# Altium PCB IR_remote.PcbDoc
Units mil, origin at the board's own origin, x right, y up, seen from the top; angles counter-clockwise.
Board outline 4465 x 2820 mil, 2 copper layers (Top Layer, Bottom Layer); 30 components, 34 nets, 121 pads, 26 vias.
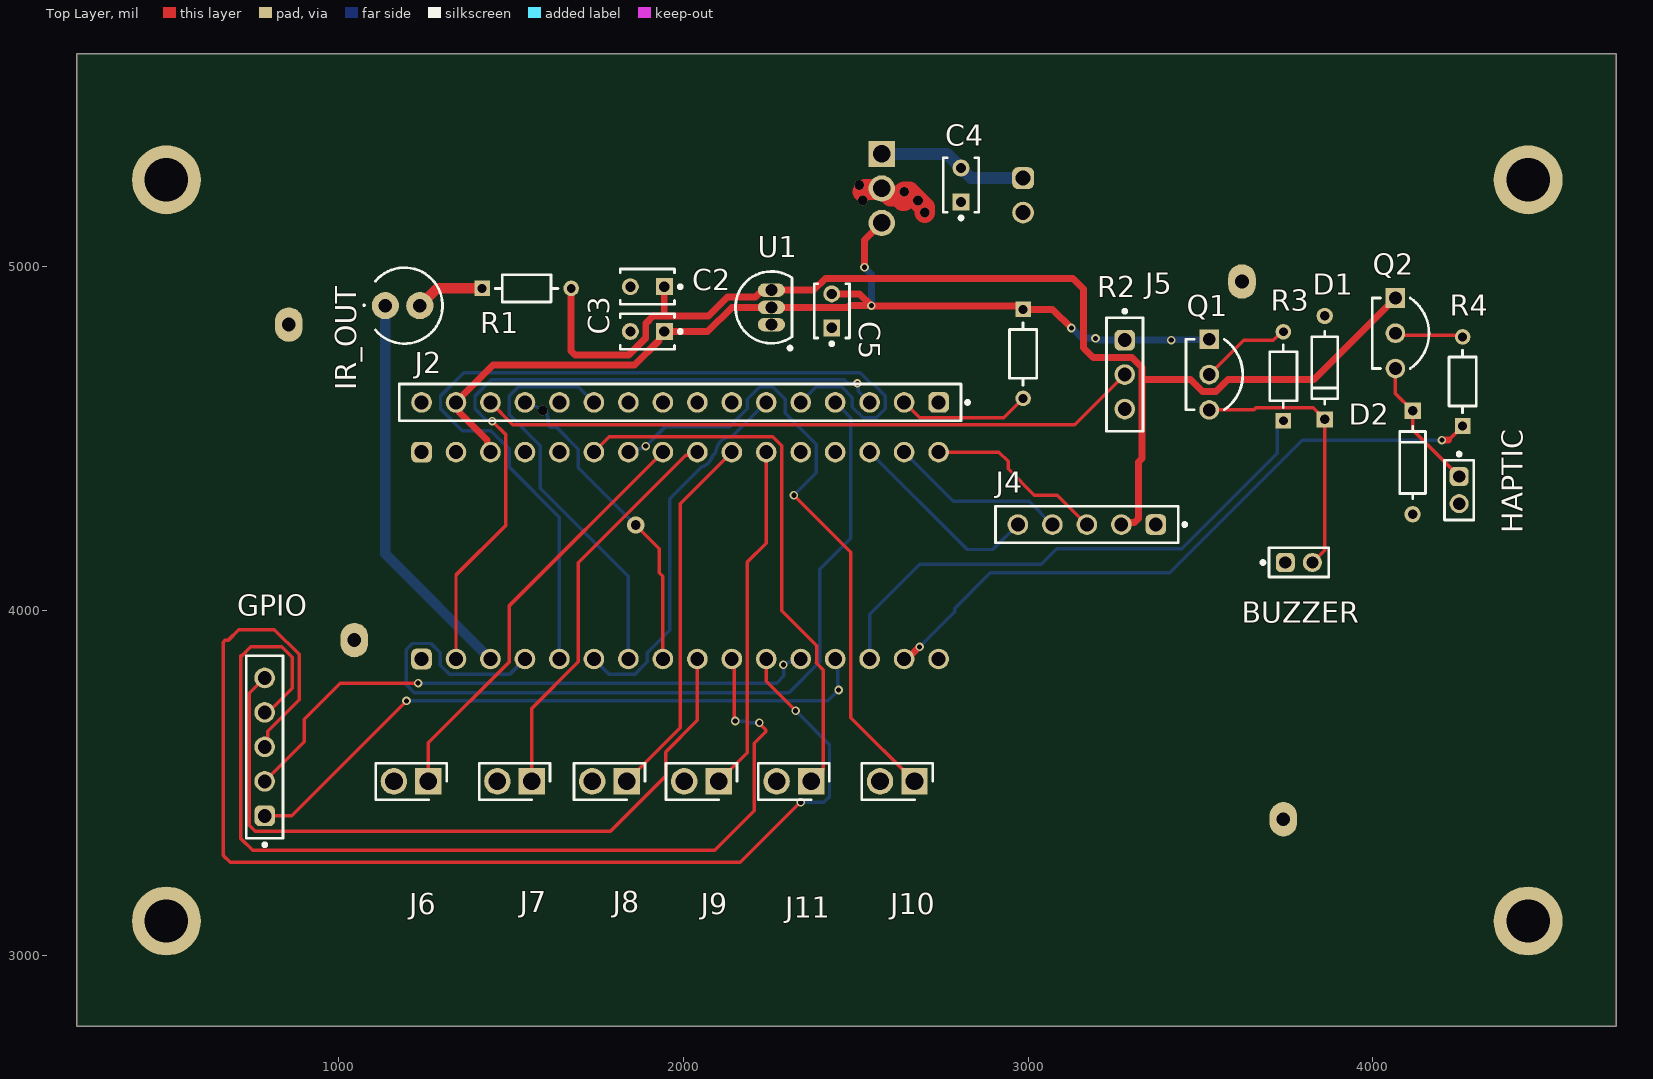
[diagram p0: Top Layer view]
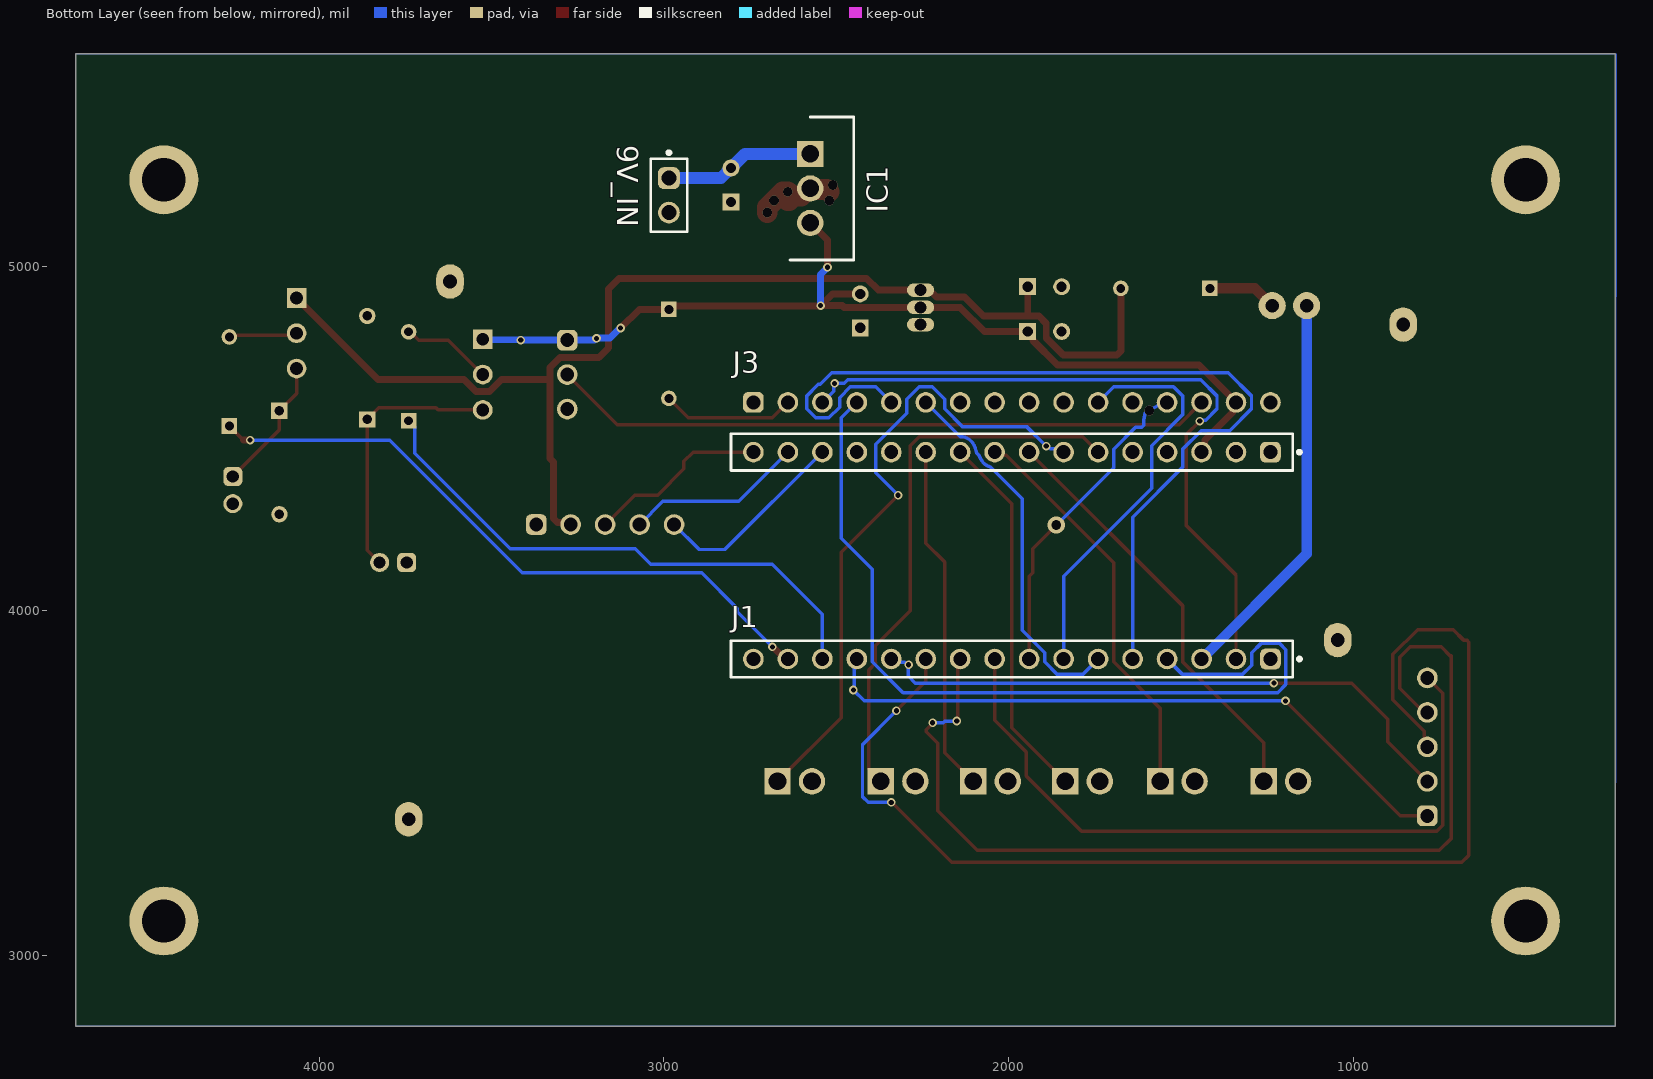
[diagram p1: Bottom Layer view, seen from below]
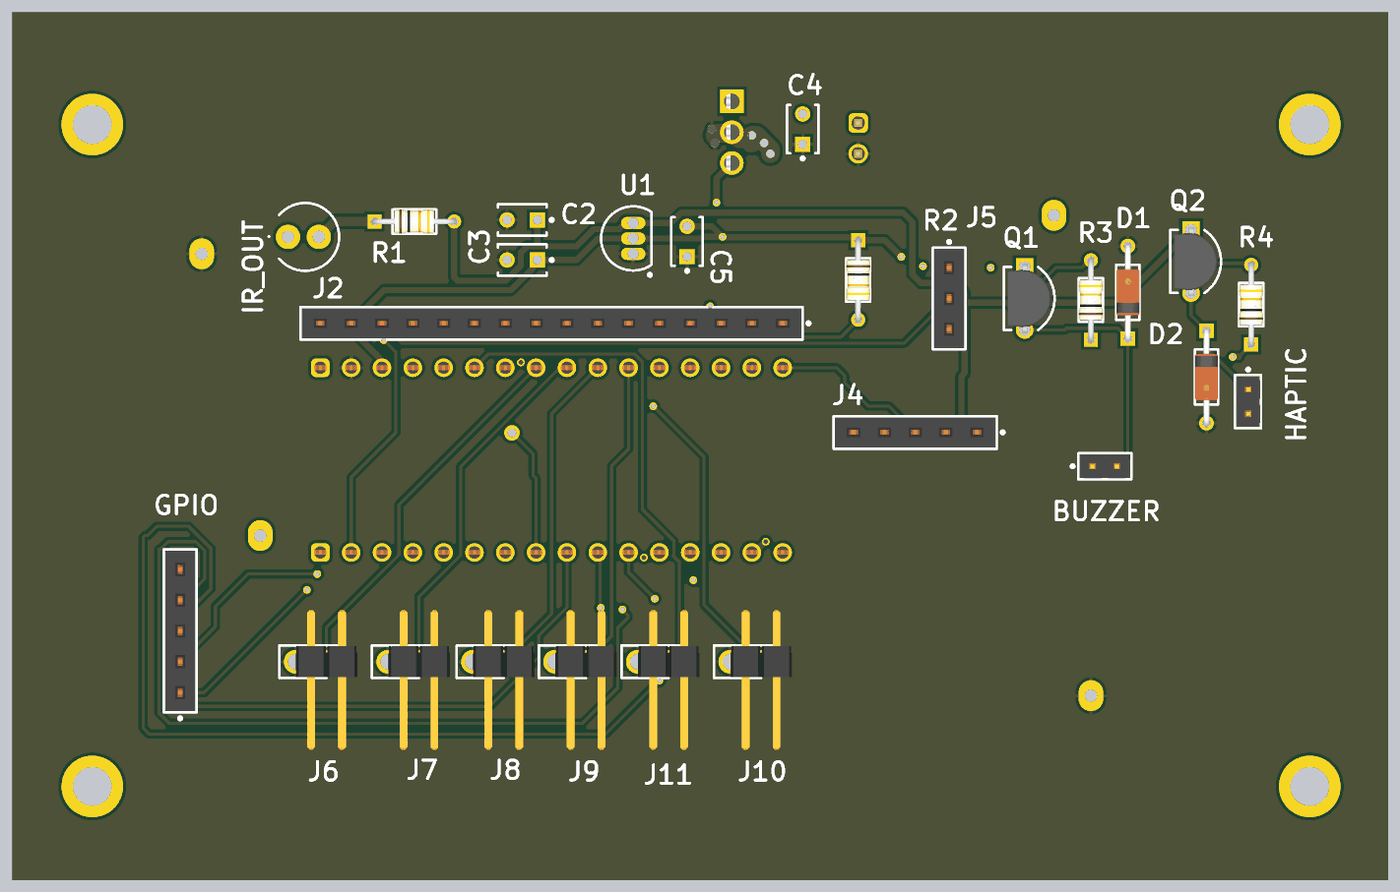
[diagram p2: 3D render of the assembled board from above, using the file's embedded part models]
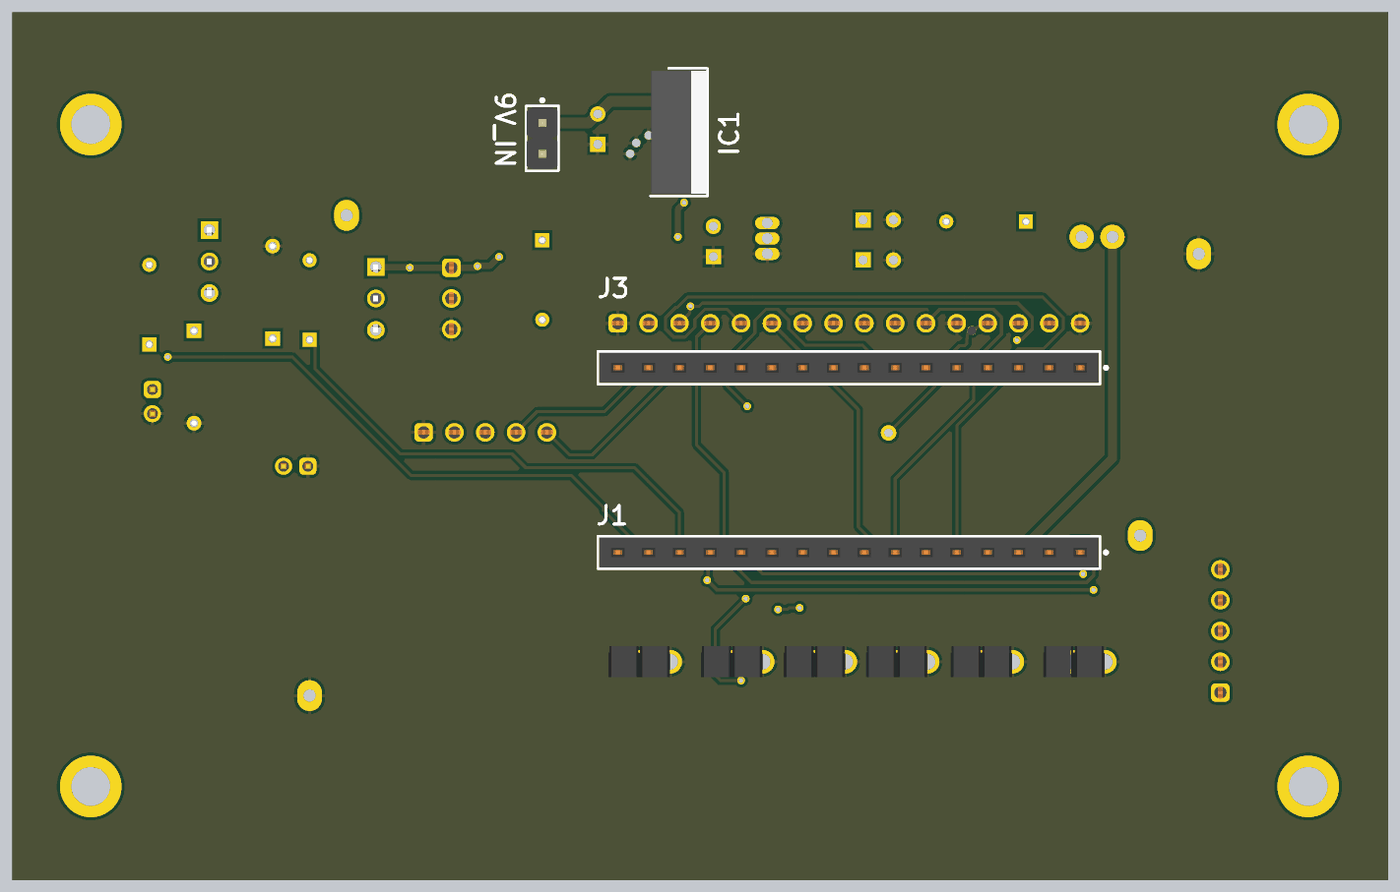
[diagram p3: 3D render of the assembled board from below, using the file's embedded part models]

## Layer stack, top to bottom
Top Solder: solder mask 0.4, Solder Resist, Dk 3.5
Top Layer: signal copper 1.4
Dielectric 1: dielectric 12.6, FR-4, Dk 4.8
Bottom Layer: signal copper 1.4
Bottom Solder: solder mask 0.4, Solder Resist, Dk 3.5

## Board outline
240,2795 4705,2795 4705,5615 240,5615

## Design rules (kind name [scope] priority, off if disabled: settings)
Clearance [All] p1: gap=10 ignorepadtopadclearanceinfootprint=FALSE
PolygonConnect [All] p1: connectstyle=Relief reliefconductorwidth=10 reliefentries=4 polygonreliefangle="90 Angle" airgapwidth=10
RoutingVias [All] p1: holewidth=15 width=25 viastyle="Through Hole" minholewidth=12 minwidth=22 maxholewidth=28 maxwidth=50
SolderMaskExpansion [All] p1: expansion=0 istentingtop=FALSE
SupplyNets "Schematic Supply Nets_3" [InNet('9V')] p1: voltage=0.000
SupplyNets "Schematic Supply Nets_2" [InNet('3V3')] p2: voltage=0.000
SupplyNets "Schematic Supply Nets_1" [InNet('GND')] p3: voltage=0.000
SupplyNets "Schematic Supply Nets" [InNet('5V')] p4: voltage=0.000
Width [All] p1: maxlimit=60 minlimit=10 preferedwidth=15
30 further rules are at their usual default settings.

## Components (designator, comment, footprint, x,y, rotation, side; value= is the part's Value field where it differs from the comment)
9V_IN "61300211121" 61300211121 2985,5205 r270 bottom (schematic designator P1)
BUZZER "Buzzer" 62000211121 3785,4140 r0 top (schematic designator P2)
C2 "K104K15X7RF5TL2" VISH-K104K15X7RF5TL2 1895,4940 r180 top
C3 "K104K15X7RF5TL2" VISH-K104K15X7RF5TL2 1895,4810 r180 top
C4 "K104K15X7RF5TL2" VISH-K104K15X7RF5TL2 2805,5235 r90 top
C5 "K104K15X7RF5TL2" VISH-K104K15X7RF5TL2 2430,4870 r90 top
D1 "1N4148" FP-017AG-MFG 3860,4705 r90 top
D2 "1N4148" FP-017AG-MFG 4115,4430 r270 top
GPIO "GPIO_F" 61300511821 785,3605 r90 top (schematic designator J12)
HAPTIC "Haptic" 62000211121 4250,4350 r270 top (schematic designator P3)
IC1 "LM7805CT" TO254P470X1028X1955-3P 2575,5325 r270 bottom
IR_OUT "SFH_4546" SFH_4556P 1185,4885 r0 top (schematic designator LED1)
J1 "EFM8LB1QFP32" 61301611821 1990,3860 r0 bottom
J2 "LCD_1602A" 61301611821 1990,4604.38 r180 top
J3 "61301611821" 61301611821 1990,4460 r0 bottom
J4 "Joystick" 61300511821 3170,4250 r180 top
J5 "61300311821" 61300311821 3280,4685 r270 top
J6 "61300211121" HDRV2W110P0X254_1X2_508X254X854P 1260,3505 r180 top
J7 "61300211121" HDRV2W110P0X254_1X2_508X254X854P 1560,3505 r180 top
J8 "61300211121" HDRV2W110P0X254_1X2_508X254X854P 1835,3505 r180 top
J9 "61300211121" HDRV2W110P0X254_1X2_508X254X854P 2101.89,3505 r180 top
J10 "61300211121" HDRV2W110P0X254_1X2_508X254X854P 2670,3505 r180 top
J11 "61300211121" HDRV2W110P0X254_1X2_508X254X854P 2370,3505 r180 top
Q1 "2N3906TF" FP-135AR-MFG 3540,4685 r0 top
Q2 "2N3906TF" FP-135AR-MFG 4080,4805 r0 top
R1 "CF18JT10K0" FP-CF18-MFG 1545,4935 r0 top value=10kΩ
R2 "CF18JT10K0" FP-CF18-MFG 2985,4745 r270 top value=10kΩ
R3 "330R" FP-CF18-MFG 3740,4680 r90 top value=10kΩ
R4 "1k" FP-CF18-MFG 4260,4665 r90 top value=10kΩ
U1 "MCP1700-3302E/TO" TO-92-TO3 2255,4880 r0 top

## Footprints (in the part's own frame and the unit in brackets; to place one, negate y for a bottom-side part, rotate by r counter-clockwise, add the part's x,y. Pads: shape width x height; smd on the part's side, far side on the other; paste and mask are expansions set on the pad)
61300211121 [mm] "Pin Header, pitch 2.54 mm, THT, Vertical, single row, 2p"
  rrect50% 1.6x1.6 hole 1.1: 1(-1.27,0)
  round 1.6 hole 1.1: 2(1.27,0)
  silkscreen extent -3.26,-1.34 2.69,1.34, body extent -2.54,-1.27 2.54,1.27, height 8.57
61300311821 [mm] "Socket Header, Pitch 2.54 mm, THT, Vertical, single row, 3p"
  rrect50% 1.52x1.52 hole 1.02: 1(-2.54,0)
  round 1.52 hole 1.02: 2(0,0) 3(2.54,0)
  silkscreen extent -4.79,-1.35 4.19,1.35, body extent -4.06,-1.25 4.06,1.25, height 8.55
61300511821 [mm] "Socket Header, Pitch 2.54 mm, THT, Vertical, single row, 5p"
  rrect50% 1.52x1.52 hole 1.02: 1(-5.08,0)
  round 1.52 hole 1.02: 2(-2.54,0) 3(0,0) 4(2.54,0) 5(5.08,0)
  silkscreen extent -7.33,-1.35 6.73,1.35, body extent -6.6,-1.25 6.6,1.25, height 8.55
61301611821 [mm] "Socket Header, Pitch 2.54 mm, THT, Vertical, single row, 16p"
  rrect50% 1.52x1.52 hole 1.02: 1(-19.05,0)
  round 1.52 hole 1.02: 2(-16.51,0) 3(-13.97,0) 4(-11.43,0) 5(-8.89,0) 6(-6.35,0) 7(-3.81,0) 8(-1.27,0) 9(1.27,0) 10(3.81,0) 11(6.35,0) 12(8.89,0) 13(11.43,0) 14(13.97,0) 15(16.51,0) 16(19.05,0)
  silkscreen extent -21.3,-1.35 20.7,1.35, body extent -20.57,-1.25 20.57,1.25, height 8.55
62000211121 [mm] "Pin Header, pitch 2.00 mm, THT, Vertical, single row, 2p"
  rrect50% 1.4x1.4 hole 0.9: 1(-1,0)
  round 1.4 hole 0.9: 2(1,0)
  silkscreen extent -2.77,-1.07 2.2,1.07, body extent -2,-1 2,1, height 6.05
FP-017AG-MFG [mm]
  rect 1.2x1.2 hole 0.7 paste-2539.97 mask+0: 1(-3.813,0)
  round 1.2 hole 0.7 paste-2539.97 mask+0: 2(3.813,0)
  silkscreen extent -2.68,-0.95 2.68,0.95, body extent -4.51,-1.05 4.51,1.05, height 0.25
FP-135AR-MFG [mm]
  rect 1.45x1.45 hole 0.95 paste-2539.97 mask+0: 1(-0.38,2.6)
  round 1.45 hole 0.95 paste-2539.97 mask+0: 2(-0.38,0) 3(-0.38,-2.6)
  silkscreen extent -2.09,-2.6 2.09,2.6, body extent -2.19,-3.42 2.19,3.42, height 0.25
FP-CF18-MFG [mm]
  rect 1.15x1.15 hole 0.65 paste-2539.97 mask+0: 1(-3.28,0)
  round 1.15 hole 0.65 paste-2539.97 mask+0: 2(3.28,0)
  silkscreen extent -2.3,-1 2.3,1, body extent -3.96,-1.1 3.96,1.1, height 0.25
HDRV2W110P0X254_1X2_508X254X854P [mm]
  rect 1.95x1.95 hole 1.3: 1(0,0)
  round 1.95 hole 1.3: 2(2.54,0)
  silkscreen extent -1.34,-1.34 3.88,1.34, body extent -2.54,-4.27 2.54,7.27, height 1.27
SFH_4556P [mm]
  round 2 hole 1: 1(-1.27,0) 2(1.27,0)
  silkscreen extent -2.86,-2.8 2.94,2.8
TO254P470X1028X1955-3P [mm]
  rect 1.935x1.935 hole 1.29: 1(0,0)
  round 1.935 hole 1.29: 2(2.54,0) 3(5.08,0)
  silkscreen extent -2.73,-1.5 7.81,3.2, body extent -2.54,-1.43 7.62,3.14, height 19.38
TO-92-TO3 [mm] "TO, Flat Index; 3 In-Line, Axial Leads; Body Dia. 4.8mm; Leads 0.56 x 0.53 mm (max)"
  oval 2x1 hole 0.9: 1(0,-1.27) 2(0,0) 3(0,1.27)
  silkscreen extent -2.65,-3.13 1.52,2.65, body extent -2.65,-2.66 1.52,2.66, height 5.33
VISH-K104K15X7RF5TL2 [mm] "THD, 2-Leads, Body 4x2.6mm"
  rect 1.25x1.25 hole 0.75: 1(-1.25,0)
  round 1.25 hole 0.75: 2(1.25,0)
  silkscreen extent -2.55,-1.3 2,1.3, body extent -2,-1.3 2,1.3, height 5.6

## Part data
9V_IN: library part CMP-1712-00002-7, "THT Vertical Pin Header WR-PHD, Pitch 2.54 mm, Single Row, 2 pins", Color=Black, Contact Resistance=20mΩ, Current Rating=3A, Max Operating Temperature=105°C, Min Operating Temperature=-40°C, Operating Supply Voltage=250V, Connector Type="Male Pin", Contact Gender=Male, Contact Material=Gold, Contact Mating Length=5.9944mm, Contact Plating=Gold, Gender=Male, Height=8.94mm, Housing Material=PBT, Lead Free="Lead Free", Lead Pitch=2.54mm, Mount="Through Hole", Number of Contacts=2, Number of Pins=2, Number of Positions=2, Number of Rows=1, Orientation=Vertical, Packaging=Bulk, Pitch=2.54mm, REACH SVHC=No, RoHS=Compliant, Termination="Through Hole", Voltage Rating=250V
BUZZER HAPTIC: library part CMP-1502-00956-5, "THT Vertical Pin Header WR-PHD, Pitch 2.00 mm, Single Row, 2 pins", Contact Resistance=20mΩ, Current Rating=2A, Max Operating Temperature=105°C, Min Operating Temperature=-40°C, Operating Supply Voltage=200V, Contact Material=Gold, Gender=Male, Height=6.35mm, Lead Pitch=2mm, Number of Contacts=2, Number of Pins=2, Number of Rows=1, Orientation=Vertical, RoHS=Compliant, Voltage Rating=200V
C2 C3 C4 C5: library part CMP-2000-06508-1, "Ceramic Capacitor, 100 nF, +/- 10%, 50 V, -55 to 125 degC, 2-Pin THD, RoHS, Tape and Reel", Capacitance=0.1µF, Manufacturer=Vishay, Operating Temperature=-55°C~125°C, Package / Case=Radial, Package Description="2-Pin Through Hole Device, Body 4 x 2.6 mm", Ratings=-, Standard Package=1, Temperature Coefficient=X7R, Tolerance=±10%, Voltage - Rated=50V, Applications=GeneralPurpose, Catalog Drawings=Mono-KapSide2-15_5.58Mono-KapSide1_15, Category=Capacitors, Datasheet URL=http://www.vishay.com/docs/45171/kseries.pdf, Datasheet Version=08/2013, Family=CeramicCapacitors, Features=-, Height - Seated (Max)="0.220\"(5.58mm)", Lead Spacing="0.098\"(2.50mm)", Lead Style=Straight, Manufacturer URL=http://www.vishay.com/, Mounting Technology=ThroughHole, Mounting Type=ThroughHole, Online Catalog=Mono-Kap™Series, Other Names=BC1084CT, Package Reference=K104K15X7RF5TL2, Packaging=CutTape(CT), Series=Mono-Kap™K, Size / Dimension="0.157\"Lx0.098\"W(4.00mmx2.50mm)", Thickness (Max)=-
D1 D2: library part CMP-07163-000046-1, "DIODE GEN PURP 100V 200MA DO35", Average Rectified Current=200mA, Capacitance=4pF, Case/Package=DO-35, Current=4A, Forward Current=300mA, Forward Voltage=1V, Max Forward Surge Current (Ifsm)=1A, Max Operating Temperature=175°C, Max Power Dissipation=500mW, Max Repetitive Reverse Voltage (Vrrm)=100V, Max Reverse Current=5uA, Min Operating Temperature=-65°C, Package Quantity=2000, Contact Plating=Tin, Current Rating=200mA, Diameter=1.91mm, Element Configuration=Single, Height=4.56mm, Lead Free="Lead Free", Length=4.56mm, Max Reverse Voltage (DC)=100V, Max Surge Current=4A, Mount="Through Hole", Number of Pins=2, Output Current=200mA, Outside Diameter=1.85mm, Packaging=Bulk, Peak Non-Repetitive Surge Current=4A, Polarity=Standard, Power Dissipation=500mW, Radiation Hardening=No, REACH SVHC="No SVHC", Recovery Time=4ns, Reverse Recovery Time=4ns, Reverse Voltage=100V, Series=-, Voltage=100V, Voltage Rating (DC)=100V, Weight=0.01lb, Width=1.91mm
GPIO J4: library part CMP-1502-01320-4, "THT Vertical Socket Header WR-PHD, Pitch 2.54 mm, Single Row, 5 pins", Contact Resistance=20mΩ, Current Rating=3A, Operating Supply Voltage=250V, Gender=Female, Lead Pitch=2.54mm, Number of Pins=5, Orientation=Vertical
IC1: "Integrated Circuit", Manufacturer_Name="Texas Instruments", Mouser Part Number=926-LM7805CT, Arrow Part Number=LM7805CT, Arrow Price/Stock=https://www.arrow.com/en/products/lm7805ct/texas-instruments?region=europe, Datasheet Link=http://www.ti.com/lit/ds/symlink/lm340.pdf, Height=4.7mm, Manufacturer_Part_Number=LM7805CT, Mouser Price/Stock=https://www.mouser.co.uk/ProductDetail/Texas-Instruments/LM7805CT?qs=QbsRYf82W3EaqXeMDVwIfQ%3D%3D
IR_OUT: "LED", Arrow Part Number="SFH 4546", Manufacturer_Name="ams OSRAM", Mouser Part Number=720-SFH4546, Arrow Price/Stock=https://www.arrow.com/en/products/sfh-4546/ams-osram?utm_currency=USD&region=nac, Datasheet Link=https://datasheet.datasheetarchive.com/originals/distributors/DKDS41/DSANUWW0036912.pdf, Manufacturer_Part_Number="SFH 4546", Mouser Price/Stock=https://www.mouser.co.uk/ProductDetail/OSRAM-Opto-Semiconductors/SFH-4546?qs=VcOkZLzzauarreCVxaCHEQ%3D%3D
J1 J2 J3: library part CMP-1502-01343-4, "THT Vertical Socket Header WR-PHD, Pitch 2.54 mm, Single Row, 16 pins", Contact Resistance=20mΩ, Current Rating=3A, Operating Supply Voltage=250V, Contact Material=Copper, Gender=Female, Lead Free="Lead Free", Lead Pitch=2.54mm, Number of Pins=16, Orientation=Vertical, RoHS=Compliant
J5: library part CMP-1502-01315-4, "Btb Conn, Rcpt, 3Pos, 1Row, 2.54Mm Rohs Compliant: Yes", Contact Resistance=20mΩ, Current Rating=3A, Operating Supply Voltage=250V, Gender=Female, Lead Pitch=2.54mm, Number of Pins=3, Orientation=Vertical, RoHS=Non-Compliant
J6 J7 J8 J9 J10 J11: "Connector", Manufacturer_Name="Wurth Elektronik", Mouser Part Number=710-61300211121, Datasheet Link=https://www.we-online.com/catalog/datasheet/61300211121.pdf, Height=8.54mm, Manufacturer_Part_Number=61300211121, Mouser Price/Stock=https://www.mouser.co.uk/ProductDetail/Wurth-Elektronik/61300211121?qs=t4813l51qx%252B1A5GYDQxPlw%3D%3D
Q1 Q2: library part CMP-00278-84408866-1, "2N3906TF Small Signal Bipolar Transistor, 0.2A I(C), 40V V(BR)CEO, 1-Element, PNP, Silicon, TO-92", Case/Package=TO-92, Collector Base Voltage (VCBO)=-40V, Collector Emitter Saturation Voltage=-400mV, Current Rating=-200mA, Emitter Base Voltage (VEBO)=-5V, Frequency=250MHz, Manufacturer Lifecycle Status=ACTIVE, Max Breakdown Voltage=160V, Max Junction Temperature (Tj)=150°C, Max Power Dissipation=625mW, Min Operating Temperature=-55°C, Collector Emitter Breakdown Voltage=-40V, Collector Emitter Voltage (VCEO)=-40V, Element Configuration=Single, Gain Bandwidth Product=250MHz, Height=5.33mm, hFE Min=100, Lead Free="Lead Free", Length=5.2mm, Lifecycle Status=Production, Max Collector Current=-200mA, Max Frequency=250MHz, Max Operating Temperature=150°C, Mount="Through Hole", NexarPartId=84408866, Number of Elements=1, Number of Pins=3, Packaging="Tape and Reel", Polarity=PNP, Power Dissipation=625mW, Radiation Hardening=No, REACH SVHC="No SVHC", RoHS=Compliant, Schedule B=8541210080, Transition Frequency=250MHz, Voltage Rating (DC)=-40V, Weight=240mg, Width=4.19mm
R1 R2: library part CMP-26528-000002-1, "RES 10K OHM 1/8W 5% CF AXIAL", Manufacturer="Stackpole Electronics", Package=CF18, Power Rating=0.125W, Resistance=10kΩ, Temperature="-55°C to +155°C", Temperature Coefficient=0-500ppm/°C, Temperature Range High=+155°C, Temperature Range Low=-55°C, Tolerance=5%, Voltage Rating=250V, Automotive=No, Category=Res, ComponentLink2Description=Datasheet, ComponentLink2URL=http://www.seielect.com/Catalog/SEI-CF_CFM.pdf, Composition="Carbon Film", Device Class L1="Passive Components", Device Class L2=Resistors, Device Class L3="Through-Hole Resistors", Digikey Description="RES 10K OHM 1/8W 5% CF AXIAL", Height=2mm, Ipc Land Pattern Name=RESAD656W65L360D200, Lead Free=Yes, Manufacturer Part Number=CF18JT10K0, Octopart=https://octopart.com/cf18jt10k0-stackpole+electronics-19205642, RoHS=TRUE, Series=CF
R3 R4: library part CMP-26528-000002-1, "RES 10K OHM 1/8W 5% CF AXIAL", Manufacturer="Stackpole Electronics", Manufacturer Part Number=CF18JT10K0, Package=CF18, Power Rating=0.125W, Resistance=10kΩ, Temperature="-55°C to +155°C", Temperature Coefficient=0-500ppm/°C, Temperature Range High=+155°C, Temperature Range Low=-55°C, Tolerance=5%, Voltage Rating=250V, Automotive=No, Category=Res, ComponentLink2Description=Datasheet, ComponentLink2URL=http://www.seielect.com/Catalog/SEI-CF_CFM.pdf, Composition="Carbon Film", Device Class L1="Passive Components", Device Class L2=Resistors, Device Class L3="Through-Hole Resistors", Digikey Description="RES 10K OHM 1/8W 5% CF AXIAL", Height=2mm, Ipc Land Pattern Name=RESAD656W65L360D200, Lead Free=Yes, Octopart=https://octopart.com/cf18jt10k0-stackpole+electronics-19205642, RoHS=TRUE, Series=CF
U1: library part CMP-0136-00007-1, "Low Quiescent Current LDO, 3-Pin TO-92, Extended TemperatureBAG", DatasheetVersion="revB, Feb-2007", PackageDescription="3-Lead Plastic Transistor Outline (TO) [TO-92]", PackageReference=TO-92-TO3, PackageVersion="revBB, Aug-2009"

## Free pads (board coordinates)
  round 200 hole 126: 1(500,3100) 1(500,5250) 1(4450,3100) 1(4450,5250)
  oval 80x100 hole 40: GND_PAD(855,4830) GND_PAD(1045,3915) GND_PAD(3620,4955) GND_PAD(3740,3395)

## Via types
v1: diameter 25, hole 15, Top Layer to Bottom Layer, 19 vias
v2: diameter 28, hole 28, Top Layer to Bottom Layer, 6 vias
v3: diameter 50, hole 28, Top Layer to Bottom Layer, 1 vias

## Nets (pads, with @x,y where several pads share a name; then routed paths per layer and width w, separated by ;. In a path a pad name is that pad's centre, name@x,y a point inside that pad or via, vN(x,y) a via of type N, cw(c..) or ccw(c..) an arc to the next point about the centre after c; other vN are vias at no path point)
3V3: C2.1 J4.2 Q2.1 R1.2 U1.3 | length 3611.3
  Top Layer w20: R1.2 1674.13,4753.98 1685.85,4742.27 1841.14,4742.27 1890.39,4791.52 1890.39,4833.68 1911.32,4854.61 1944.21,4854.61 ; C2.1 1944.21,4900.71 1944.21,4854.61 ; J4.2 3276.38,4256.38 3308.36,4256.38 3320.08,4268.09 3320.08,4431.96 3329.92,4441.81 3329.92,4605.68 3329.92,4671.18 ; Q2.1 3828.86,4671.18 3579.87,4671.18 3545.15,4636.46 3504.93,4636.46 3470.21,4671.18 3329.92,4671.18 ; 1944.21,4854.61 2072.18,4854.61 2127.57,4910 2209.19,4910 2218.88,4919.69 2219.76,4919.69 2230.07,4930 2377.71,4930 2411.52,4963.82 3130.15,4963.82 3160.68,4933.28 3160.68,4762.73 3188.49,4734.92 3300.68,4734.92 3329.92,4705.68 3329.92,4671.18
5V: C3.1 C5.2 IC1.3 J2.15 J3.3 J5.1 Q1.1 R2.1 U1.2 | length 2932
  Top Layer w20: J3.3 1430.74,4469.26 1430.74,4494.26 1349.54,4575.46 1349.54,4594.84 J2.15 1340,4605 1447.27,4712.27 1857.27,4712.27 1929.61,4784.61 1929.61,4795.39 C3.1 2070,4810 2140,4880 U1.2 2477.22,4880 2482.22,4885 v1(2545,4885) 2545.96,4884.04 2975.09,4884.04 R2.1 3070.87,4874.13 v1(3125,4820) ; C5.2 2510.79,4919.21 v1@2543.37,4886.63 ; v1(2525,4996.32) 2525,5075 IC1.3
  Bottom Layer w20: v1(2525,4996.32) 2525,4994.97 2545,4974.97 v1(2545,4885) ; v1(3125,4820) 3126.35,4820 3155.4,4790.96 3194.04,4790.96 v1(3195,4790) 3196.35,4790 3201.35,4785 v1(3415,4785) 3415.96,4785.96 3523.63,4785.96 Q1.1
9V: 9V_IN.1 C4.2 IC1.1 | length 439
  Bottom Layer w35: IC1.1 2764.21,5325 C4.2 2834.21,5255 9V_IN.1
D4: J1.6 J2.6 | length 1093.1
  Bottom Layer w10: J1.6 1784.92,3815.08 1858.61,3815.08 1895.08,3851.55 1895.08,3878.61 1960,3943.53 1960,4325 2051.6,4416.6 ccw(c2040,4460) 2080.38,4440.32 2085.19,4450.19 2092.33,4457.33 2096.95,4472.84 cw(c2140,4460) 2139.92,4504.92 2239.38,4604.38 J2.6
D5: J1.5 J2.5 | length 2664.3
  Bottom Layer w10: J1.5 1640,4271.72 1495.08,4416.64 1495.08,4468.45 1441.03,4522.5 1358.35,4522.5 1295.08,4585.77 1295.08,4622.98 1362.02,4689.92 2512.68,4689.92 2546.15,4656.45 2551.45,4656.45 2584.92,4622.98 2584.92,4585.77 2558.61,4559.46 2521.39,4559.46 2490,4590.85 2490,4617.91 2458.61,4649.3 2384.92,4649.3 J2.5
D6: J1.4 J2.4 | length 2585.6
  Bottom Layer w10: J1.4 1495.08,3815.08 1321.39,3815.08 1294.38,3842.09 1294.38,3877.91 1267.37,3904.92 1212.63,3904.92 1195.08,3887.37 1195.08,3786.03 1218.61,3762.5 2306.03,3762.5 2395.08,3851.55 2395.08,4120.16 2484.92,4210 2484.92,4559.46 J2.4
D7: J1.2 J2.3 | length 2071.1
  Top Layer w10: J1.2 1340,4103.59 1484.92,4248.51 1484.92,4510.08 v1(1445,4550)
  Bottom Layer w10: v1(1445,4550) 1442.13,4552.87 1427.98,4552.87 1395.08,4585.77 1395.08,4622.98 1442.02,4669.92 1703.36,4669.92 2466.27,4669.92 2476.83,4659.36 v1(2504.36,4659.36) ; v1@2505,4659.36 2507.23,4657.13 2507.23,4637.15 J2.3
E: J1.7 J2.11 | length 1181.5
  Bottom Layer w10: J2.11 1740,4605 1695.08,4649.92 1521.39,4649.92 1495.08,4623.61 1495.08,4568.45 1584.92,4478.61 1584.92,4355.08 1840,4100 J1.7
GND: 9V_IN.2 BUZZER.1 C2.2 C3.2 C4.1 C5.1 D1.2 D2.2 HAPTIC.2 IC1.2 J2.1 J2.12 J2.16 J3.2 J4.1 J5.3 J6.2 J7.2 J8.2 J9.2 J10.2 J11.2 pad.GND_PAD@855,4830 pad.GND_PAD@3740,3395 U1.1 | length 258.8
  Top Layer w60: 2520,5215 2526.9,5221.9 2571.9,5221.9 IC1.2 2579.38,5225 2601.29,5203.09 2623.2,5203.09 2636.29,5190 2640,5190 2638.15,5191.85 2638.15,5213.15 v2(2640,5215) 2655,5215 2700,5170 v2(2700,5155)
  other v2: 2520,5190 2680,5190 2510,5235
NetD1_1: BUZZER.2 D1.1 Q1.3 | length 781
  Top Layer w10: Q1.3 3654.89,4582.64 3660.75,4588.5 3826.38,4588.5 D1.1 3860,4175.63 BUZZER.2
NetD2_1: D2.1 HAPTIC.1 Q2.3 | length 389.9
  Top Layer w10: Q2.3 4065.04,4630.08 D2.1 4115,4524.37 HAPTIC.1
NetJ2_2: J2.2 R2.2 | length 387
  Top Layer w10: J2.2 2684.92,4559.46 2928.59,4559.46 R2.2
NetJ2_14: J2.14 J5.2 | length 1927.2
  Top Layer w10: J2.14 1504.92,4539.46 3134.46,4539.46 J5.2
NetJ3_6: J3.6 J11.1 | length 1614.2
  Top Layer w10: J3.6 1784.92,4504.92 2258.61,4504.92 2285.08,4478.45 2285.08,3999.92 2364.91,3920.09 2386.81,3898.19 2386.81,3867.22 2386.81,3850.9 2384.43,3848.52 2387.36,3845.59 2402.07,3830.88 2405,3827.95 2405,3540 J11.1
NetJ3_7: J3.7 J10.1 | length 1883.3
  Top Layer w10: v1(2320,4335) 2484.92,4170.08 2484.92,3690.08 J10.1
  Bottom Layer w10: J3.7 1853.49,4460 1863.02,4469.54 1878.61,4469.54 1886.5,4477.42 v1(1890.56,4477.42) ; v1@1889.32,4478.66 1891.79,4478.66 1946.18,4533.04 2132.2,4533.04 2184.92,4585.77 2184.92,4613.45 2221.39,4649.92 2258.61,4649.92 2295.08,4613.45 2295.08,4572.34 2384.92,4482.5 2384.92,4399.92 v1(2320,4335)
NetJ3_8: J3.8 J6.1 | length 1236.7
  Top Layer w10: J6.1 1260,3616.47 1495.08,3851.55 1495.08,4015.08 J3.8
NetJ3_9: J3.9 J7.1 | length 1167.6
  Top Layer w10: J7.1 1560,3716.47 1695.08,3851.55 1695.08,4138.61 2006.93,4450.46 2030.46,4450.46 J3.9
NetJ3_10: J3.10 J8.1 | length 1081.3
  Top Layer w10: J8.1 1990,3660 1990,4310 J3.10
NetJ3_11: J3.11 J9.1 | length 1012.2
  Top Layer w10: J9.1 2185.08,3588.19 2185.08,4141.23 2240,4196.15 J3.11
NetLED1_2: IR_OUT.2 R1.1 | length 201.6
  Top Layer w30: IR_OUT.2 1285,4935 R1.1
NetQ1_2: Q1.2 R3.2 | length 266.4
  Top Layer w10: Q1.2 3625.04,4785 3710.91,4785 3735.04,4809.13 R3.2
NetQ2_2: Q2.2 R4.2 | length 199.5
  Top Layer w10: Q2.2 4071.07,4798.97 4255.16,4798.97 R4.2
P0.2: J1.15 R4.1 | length 1905.8
  Top Layer w10: 4219.48,4495.35 R4.1
  Top Layer w20: J1.15 2648.65,3860 2683.65,3895 v1(2685,3895) ; v1(4200,4495) 4200.35,4495.35 4219.48,4495.35
  Bottom Layer w10: v1(2685,3895) 2786.43,3996.43 2786.43,4006.43 2890,4110 3410.36,4110 3795.36,4495 v1(4200,4495)
P0.3: J1.14 R3.1 | length 1606.8
  Bottom Layer w10: J1.14 2540,3990 2685,4135 3037.5,4135 3082.5,4180 3445,4180 3722.36,4457.36 3722.36,4533.23 R3.1
P0.4: GPIO.1 J1.13 | length 1910.3
  Top Layer w10: GPIO.1 863.12,3405 v1(1196.56,3738.44)
  Bottom Layer w10: v1(1196.56,3738.44) 2418.44,3738.44 v1(2450,3770) 2447.13,3772.87 2447.13,3852.87 J1.13
P0.5: GPIO.2 J1.12 | length 1760.5
  Top Layer w10: GPIO.2 899.49,3619.49 899.49,3685.05 1004.45,3790 v1(1230,3790)
  Bottom Layer w10: v1(1230,3790) 2270,3790 2290.92,3810.92 2290.92,3842.23 v1(2289.73,3843.42) ; v1@2289.73,3845 2295.37,3845 2300.83,3850.46 2330.46,3850.46 J1.12
P0.6: GPIO.3 J1.11 | length 3514.5
  Top Layer w10: GPIO.3 793.45,3613.45 793.45,3649.92 885,3741.47 885,3873.28 813.28,3945 710,3945 680,3915 670.86,3915 665,3909.14 665,3290 685,3270 2165,3270 2339.11,3444.11 v1(2340,3444.11) ; J1.11 2240,3795 v1(2325,3710)
  Bottom Layer w10: v1(2325,3710) 2423.39,3611.61 2423.39,3460.4 2407.1,3444.11 v1(2340,3444.11)
P0.7: GPIO.4 J1.10 | length 2985.3
  Top Layer w10: GPIO.4 795,3705 865,3775 865,3865 835,3895 745,3895 720,3870 715.86,3870 715.86,3339.14 750,3305 2090,3305 2205.08,3420.08 2205.08,3615.08 2238.36,3648.36 2238.36,3654.47 2220,3672.83 v1(2220,3675) ; J1.10 2147.13,3852.87 2147.13,3682.87 v1(2150,3680)
  Bottom Layer w10: v1(2150,3680) 2183.93,3680 2188.93,3675 v1(2220,3675)
P1.0: GPIO.5 J1.9 | length 2105.5
  Top Layer w10: GPIO.5 740.08,3760.08 740.08,3377.63 757.63,3360.08 1788.06,3360.08 1948.5,3520.52 1948.5,3590.22 2040,3681.72 J1.9
P1.1: J1.8 J2.13 | length 940.5
  Top Layer w10: v3(1861.52,4248.48) 1930,4180 1930,4110 1940,4100 J1.8
  Bottom Layer w10: J2.13 1551.66,4604.38 v2(1591.47,4580.87) ; v2@1591.47,4585 v2(1591.47,4580.87) ; v3(1861.52,4248.48) 1695.08,4414.92 1695.08,4468.45 1631.57,4531.96 1613.04,4531.96 1607.19,4537.81 1607.19,4552.94 1603.46,4575.01 1597.6,4580.87 v2(1591.47,4580.87)
P1.6: IR_OUT.1 J1.3 | length 1151.3
  Bottom Layer w30: IR_OUT.1 1135,4165 J1.3
P2.1: J3.16 J4.3 | length 529.9
  Top Layer w10: J3.16 2915,4460 2941.5,4433.5 2941.5,4411.48 3017.47,4335.51 3084.49,4335.51 J4.3
P2.2: J3.15 J4.4 | length 517
  Bottom Layer w10: J3.15 2782.5,4317.5 3002.5,4317.5 J4.4
P2.3: J3.14 J4.5 | length 577
  Bottom Layer w10: J3.14 2822.46,4177.54 2897.54,4177.54 J4.5
pads on no net: J1.1 J1.16 J2.7 J2.8 J2.9 J2.10 J3.1 J3.4 J3.5 J3.12 J3.13

## Polygon pours and split planes (outlines as drawn)
GND on Bottom Layer "GND_L-01_P-001" (solid, shelved, pour order 1): 237.64,5615 240.03,2795 4705,2795 4705,5615
GND on Top Layer "GND_L-01_P-001" (solid, shelved, pour order 0): 240,5615 240,2795 4705,2795 4705,5615